# Altium PCB project_12.PcbDoc
Units mil, origin at the board's own origin, x right, y up, seen from the top; angles counter-clockwise.
Board outline 2965 x 1825 mil, 2 copper layers (Top Layer, Bottom Layer); 15 components, 43 nets, 104 pads, 4 vias.
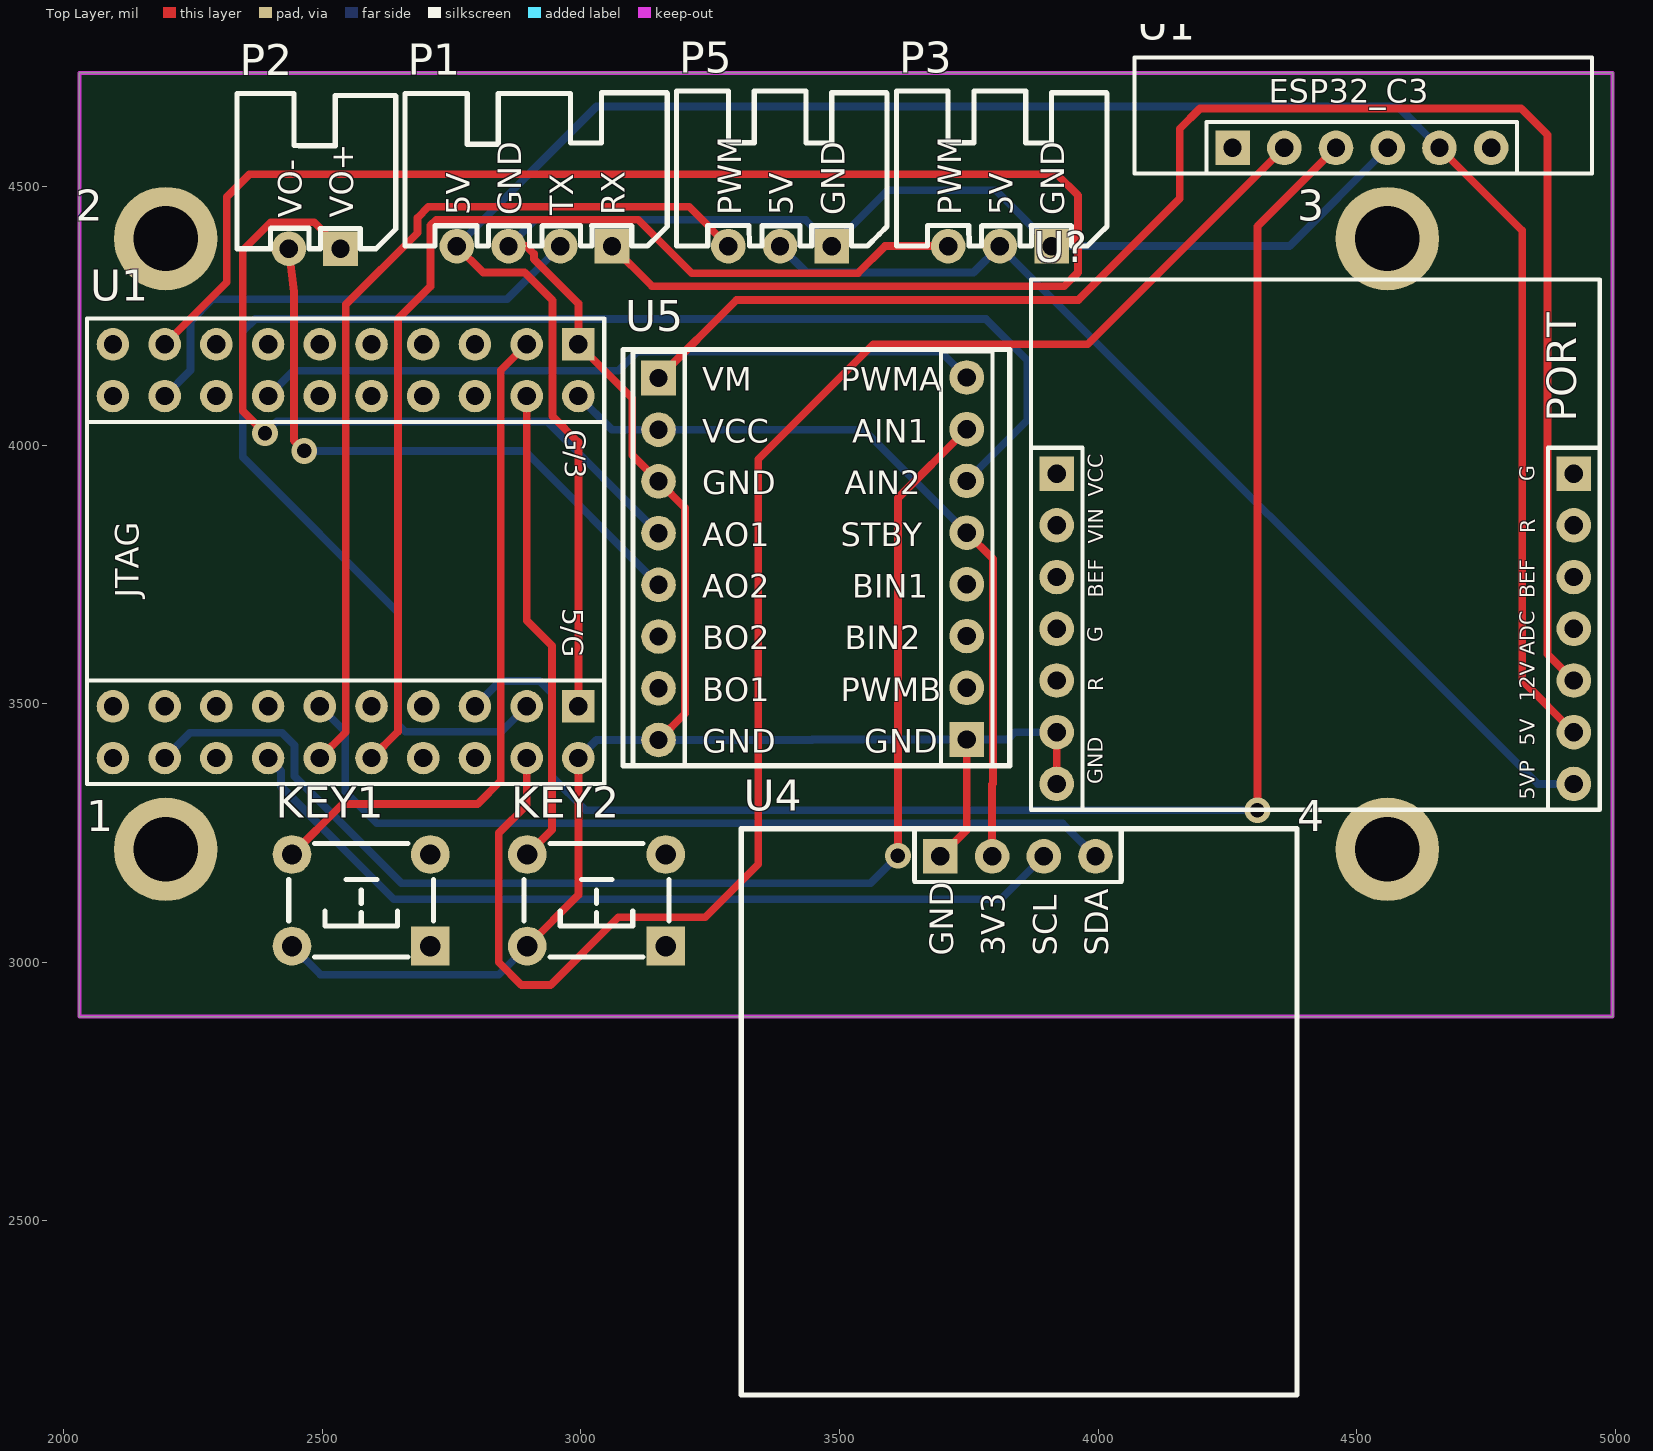
[diagram p0: Top Layer view]
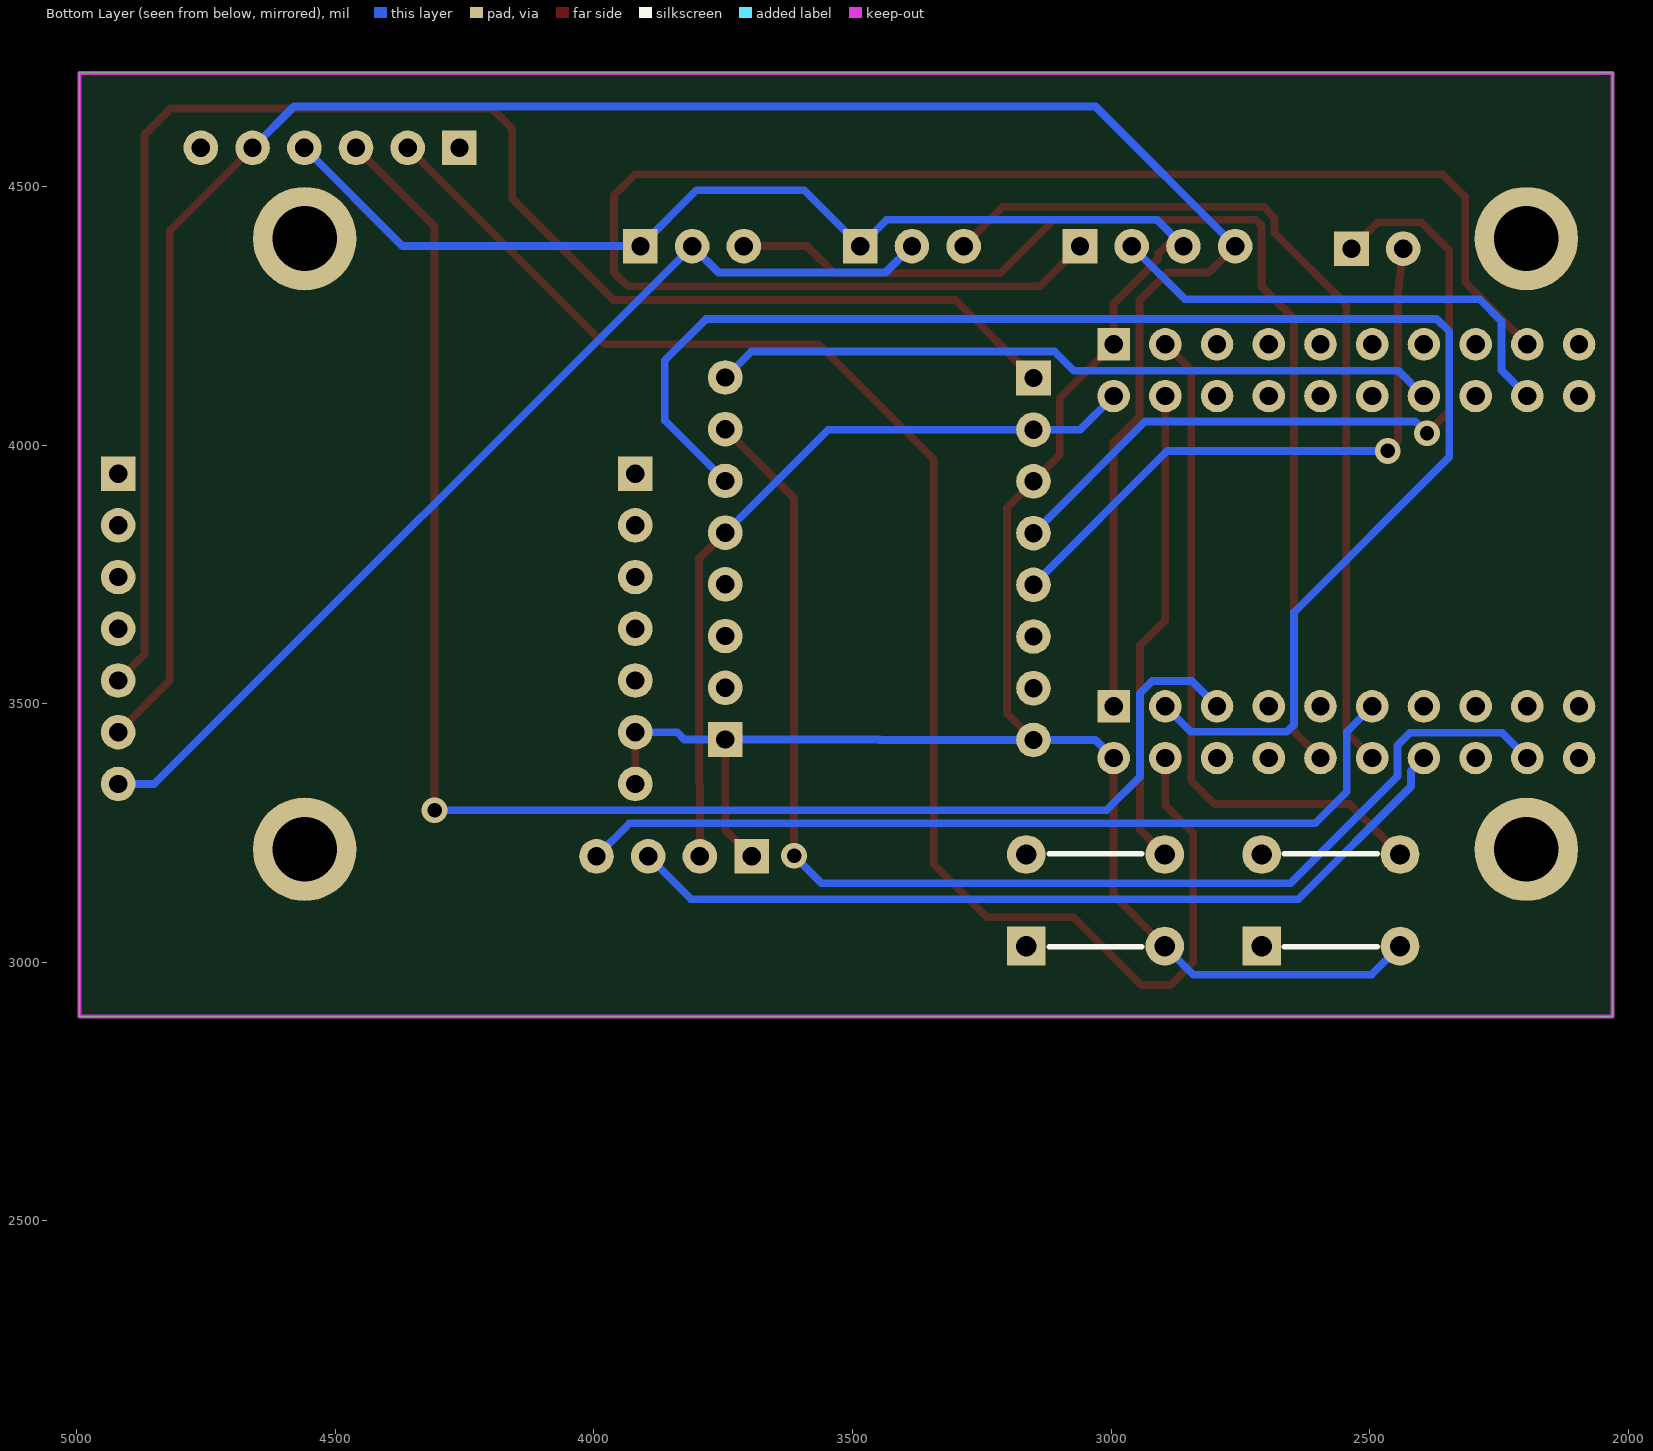
[diagram p1: Bottom Layer view, seen from below]

## Layer stack, top to bottom
Top Solder: solder mask 0.4, Solder Resist, Dk 3.5
Top Layer: signal copper 1.4
Dielectric 1: dielectric 12.6, FR-4, Dk 4.8
Bottom Layer: signal copper 1.4
Bottom Solder: solder mask 0.4, Solder Resist, Dk 3.5

## Board outline
2030,2895 4995,2895 4995,4720 2030,4720

## Design rules (kind name [scope] priority, off if disabled: settings)
Clearance [All] p1: gap=10 ignorepadtopadclearanceinfootprint=FALSE
PolygonConnect [All] p1: connectstyle=Relief reliefconductorwidth=10 reliefentries=4 polygonreliefangle="90 Angle" airgapwidth=10
RoutingVias [All] p1: holewidth=28 width=50 viastyle="Through Hole" minholewidth=28 minwidth=50 maxholewidth=28 maxwidth=50
SolderMaskExpansion [All] p1: expansion=4 istentingtop=FALSE
SupplyNets "Schematic Supply Nets_4" [InNet('5V_POW')] p1: voltage=0.000
SupplyNets "Schematic Supply Nets_3" [InNet('12V')] p2: voltage=0.000
SupplyNets "Schematic Supply Nets_2" [InNet('3V3')] p3: voltage=0.000
SupplyNets "Schematic Supply Nets_1" [InNet('5V')] p4: voltage=0.000
SupplyNets "Schematic Supply Nets" [InNet('GND')] p5: voltage=0.000
Width [All] p1: maxlimit=100 minlimit=10 preferedwidth=15 minimp=50.000000 maximp=50.000000 favimp=50.000000
30 further rules are at their usual default settings.

## Classes and differential pairs
component class project_12: 1 2 3 4 KEY1 KEY2 P1 P2 P3 P5 U1 U4 U5 U?

## Components (designator, comment, footprint, x,y, rotation, side; value= is the part's Value field where it differs from the comment)
1 "M3" "M3 125X200" 2197.01,3218.5 r90 top locked
2 "M3" "M3 125X200" 2197.01,4399.61 r90 top locked
3 "M3" "M3 125X200" 4559.21,4399.61 r90 top locked
4 "M3" "M3 125X200" 4559.21,3218.5 r90 top locked
KEY1 "mod_buttom" MOD_BUTTOM 2585,3120 r180 top
KEY2 "mod_buttom" MOD_BUTTOM 3040,3120 r180 top
P1 "port_uart_4p" XH2.54_4P 2915,4540 r0 top
P2 "port_mot_2p" XH2.54_2P 2480,4505 r0 top
P3 "port_pwm_3p" XH2.54_3P 3825,4520 r0 top
P5 "port_pwm_3p" XH2.54_3P 3400,4520 r0 top
U1 "f1_hw_1_gw" F1_HW_1_GW 2530,3805 r0 top
U1 "c3_hw_1" C3_HW_1 4510,4575 r0 top
U4 "mod_oled" mod_oled 3849.91,3203.15 r0 top
U5 "mod_tb6612" MOD_TB6612 3455,3780 r0 top
U? "pow_hw_3_V02.00" POW_HW_3_2 4385,3765 r90 top

## Footprints (in the part's own frame and the unit in brackets; to place one, negate y for a bottom-side part, rotate by r counter-clockwise, add the part's x,y. Pads: shape width x height; smd on the part's side, far side on the other; paste and mask are expansions set on the pad)
C3_HW_1 [mm]
  rect 1.7x1.7 hole 0.9: 1(-6.35,0)
  round 1.7 hole 0.9: 2(-3.81,0) 3(-1.27,0) 4(1.27,0) 5(3.81,0) 6(6.35,0)
  silkscreen extent -11.18,-1.27 11.3,4.44, body extent -11.18,-1.27 11.3,4.44, height 8.5
F1_HW_1_GW [mm]
  rect 1.6x1.6 hole 0.9: 1(11.811,9.906) 21(11.811,-7.874)
  round 1.6 hole 0.9: 2(11.811,7.366) 3(9.271,9.906) 4(9.271,7.366) 5(6.731,9.906) 6(6.731,7.366) 7(4.191,9.906) 8(4.191,7.366) 9(1.651,9.906) 10(1.651,7.366) 11(-0.889,9.906) 12(-0.889,7.366) 13(-3.429,9.906) 14(-3.429,7.366) 15(-5.969,9.906) 16(-5.969,7.366) 17(-8.509,9.906) 18(-8.509,7.366) 19(-11.049,9.906) 20(-11.049,7.366) 22(11.811,-10.414) 23(9.271,-7.874) 24(9.271,-10.414) 25(6.731,-7.874) 26(6.731,-10.414) 27(4.191,-7.874) 28(4.191,-10.414) 29(1.651,-7.874) 30(1.651,-10.414) 31(-0.889,-7.874) 32(-0.889,-10.414) 33(-3.429,-7.874) 34(-3.429,-10.414) 35(-5.969,-7.874) 36(-5.969,-10.414) 37(-8.509,-7.874) 38(-8.509,-10.414) 39(-11.049,-7.874) 40(-11.049,-10.414)
  silkscreen extent -12.32,-11.68 13.08,11.18, body extent -12.38,-11.68 13.08,11.18, height 8.5
"M3 125X200" [mil] "M3螺丝孔，孔125Mil，焊盘200Mil"
  round 200 hole 125: 1(0,0)
MOD_BUTTOM [mm]
  rect 1.9x1.9 hole 1: 1(-3.146,2.25)
  round 1.9 hole 1: 2(-3.146,-2.25) 3(3.654,-2.25) 4(3.654,2.25)
  silkscreen extent -3.3,-2.79 3.81,2.79, body extent -3.85,-3 4.36,3, height 4.25
mod_oled [mm] "外购屏幕模块接口"
  rect 1.7x1.7 hole 0.9: 1(-3.935,0.047)
  round 1.7 hole 0.9: 2(-1.395,0.047) 3(1.145,0.047) 4(3.685,0.047)
  silkscreen extent -13.72,-26.4 13.58,1.4, body extent -13.72,-26.42 13.59,1.4, height 8.5
MOD_TB6612 [mm]
  rect 1.7x1.7 hole 0.9: 1(-7.747,8.89) 16(7.391,-8.867)
  round 1.7 hole 0.9: 2(-7.747,6.35) 3(-7.747,3.81) 4(-7.747,1.27) 5(-7.747,-1.27) 6(-7.747,-3.81) 7(-7.747,-6.35) 8(-7.747,-8.89) 9(7.391,8.913) 10(7.391,6.373) 11(7.391,3.833) 12(7.391,1.293) 13(7.391,-1.247) 14(7.391,-3.787) 15(7.391,-6.327)
  silkscreen extent -9.5,-10.16 9.5,10.29, body extent -9.5,-10.16 9.5,10.29, height 8.5
POW_HW_3_2 [mm]
  rect 1.7x1.7 hole 0.9: 1(4.572,11.811) 7(4.572,-13.589)
  round 1.7 hole 0.9: 2(2.032,11.811) 3(-0.508,11.811) 4(-3.048,11.811) 5(-5.588,11.811) 6(-10.668,11.811) 6(-8.128,11.811) 8(2.032,-13.589) 9(-0.508,-13.589) 10(-3.048,-13.589) 11(-5.588,-13.589) 12(-8.128,-13.589) 13(-10.668,-13.589)
  silkscreen extent -11.94,-14.86 14.1,13.08, body extent -11.94,-14.86 14.1,13.08, height 8.5
XH2.54_2P [mm]
  rect 1.7x1.7 hole 0.9: 1(1.397,-3.175)
  round 1.7 hole 0.9: 2(-1.143,-3.175)
  silkscreen extent -3.68,-3.17 4.11,4.44, body extent -3.64,-3.52 3.9,4.17, height 5.73
XH2.54_3P [mm]
  rect 1.7x1.7 hole 0.9: 1(2.159,-3.429)
  round 1.7 hole 0.9: 2(-0.381,-3.429) 3(-2.921,-3.429)
  silkscreen extent -5.46,-3.43 4.88,4.19, body extent -5.42,-3.78 4.66,3.92, height 5.73
XH2.54_4P [mm]
  rect 1.7x1.7 hole 0.9: 1(3.683,-3.937)
  round 1.7 hole 0.9: 2(1.143,-3.937) 3(-1.397,-3.937) 4(-3.937,-3.937)
  silkscreen extent -6.48,-3.94 6.4,3.59, body extent -6.44,-4.29 6.18,3.41, height 5.73

## Part data
1 2 3 4: library part prot_m3, "m3铜柱孔", BOM名称=铜柱孔, 学习资源=www.ooocke.com, 版权归属=源创客
KEY1 KEY2: "6*6*4.3按键"
P1: "串口接口/SPP蓝牙模块 / XH2.54弯排针4p/4p排母"
P2: "开环直流电机接口 / XH2.54弯排针2p"
P3 P5: "舵机接口 / XH2.54弯排针3p"
U1: "ESP32C3蓝牙模块 / 6p排母"
U4: "外购屏幕模块"
U5: "TB6612模块 / 8p排母*2"
U?: "两路降压电源模块一路通用电源模块"

## Via types
v1: diameter 50, hole 28, Top Layer to Bottom Layer, 4 vias

## Nets (pads, with @x,y where several pads share a name; then routed paths per layer and width w, separated by ;. In a path a pad name is that pad's centre, name@x,y a point inside that pad or via, vN(x,y) a via of type N, cw(c..) or ccw(c..) an arc to the next point about the centre after c; other vN are vias at no path point)
3V3: U1.2@2995,4095 U4.2 U5.2 U5.12 | length 1508.2
  Top Layer w15: U5.12 3797,3779.89 3797,3346 3795,3344 U4.2
  Bottom Layer w15: U1.2@2995,4095 3060,4030 U5.2 3546.89,4030 U5.12
5V: P1.4 U1.5@4660,4575 U1.21 U?.12 | length 4316.9
  Top Layer w15: P1.4 2811,4334 2891,4334 2945,4280 2945,4056 2995,4006 U1.21 ; U1.5@4660,4575 4820,4415 4820,3545 U?.12
  Bottom Layer w15: P1.4 3030,4655 4580,4655 U1.5@4660,4575
5V_POW: P3.2 P5.2 U?.13 | length 2008
  Bottom Layer w15: P5.2 3436,4334 3759,4334 P3.2 4850,3345 U?.13
12V: U5.1 U?.11 | length 3111.1
  Top Layer w15: U5.1 3301,4281 3962,4281 4158,4477 4158,4612 4197,4651 4818,4651 4869,4600 4869,3596 U?.11
AO1: P2.1 U5.4 | length 1464.3
  Top Layer w15: v1(2389,4023) 2346,4066 2346,4377 2400,4431 2484,4431 P2.1
  Bottom Layer w15: v1(2389,4023) 2412.01,4046.01 2933.99,4046.01 U5.4
AO2: P2.2 U5.5 | length 1192.2
  Top Layer w15: P2.2 2445,4297 2445,4009 v1(2465,3989)
  Bottom Layer w15: v1(2465,3989) 2891,3989 U5.5
BOOT0: U1.35
GND: KEY1.4 KEY2.4 P1.3 P3.1 P5.1 U1.1@2995,4195 U1.4@4560,4575 U1.22 U4.1 U5.3 U5.8 U5.16 U?.6 | length 5245.9
  Top Layer w15: P1.3 2894.03,4385 2909.03,4370 2909.03,4360 2995,4274.03 2995,4195 3099,4091 3099,3981 U5.3 3201,3879 3201,3481 U5.8 ; KEY2.4 2995,3130.28 U1.22 ; U4.1 3745.98,3255.98 U5.16 ; U?.6@3920,3345 U?.6@3920,3445
  Bottom Layer w15: KEY1.4 2496.56,2976 2840.72,2976 KEY2.4 ; P1.3 2911,4436 3434,4436 P5.1 3593,4493 3802,4493 P3.1 4370,4385 U1.4@4560,4575 ; U1.22 3030,3430 U5.8 3447,3430 3447.91,3430.91 U5.16 3825,3430.91 3839.09,3445 U?.6@3920,3445
NRST: U1.12
PA0: U1.20
PA1: U1.19
PA2: P1.2 U1.18 | length 940.8
  Bottom Layer w15: U1.18 2245,4145 2245,4240 2287,4282 2857,4282 P1.2
PA3: P1.1 U1.17 | length 3109
  Top Layer w15: U1.17 2315,4315 2315,4480 2359,4524 3920,4524 3961,4483 3961,4334 3934.5,4307.5 3137.5,4307.5 P1.1
PA4: U1.16
PA5: U1.15
PA6: U1.14 U5.9 | length 1407.4
  Bottom Layer w15: U1.14 2444,4144 3072,4144 3109,4181 3695.89,4181 U5.9
PA7: U1.13
PA8: U1.23 U5.11 | length 3001
  Bottom Layer w15: U1.23 2846,3446 2660,3446 2646,3460 2646,3677.19 2346,3977.19 2346,4220 2370,4244 3783,4244 3863,4164 3863,4047.92 U5.11
PA9: U1.2@4360,4575 U1.24 | length 3083.9
  Top Layer w15: U1.24 2895,3304 2841,3250 2841,3000 2885,2956 2941,2956 3072,3087 3240,3087 3343,3190 3343,3973 3565,4195 3980,4195 U1.2@4360,4575
PA10: U1.3@4460,4575 U1.25 | length 3075.1
  Top Layer w15: v1(4308,3294.03) 4308,4423 U1.3@4460,4575
  Bottom Layer w15: U1.25 2844,3544 2920,3544 2944,3520 2944,3359 3008.97,3294.03 v1(4308,3294.03)
PA11: U1.26
PA12: U1.27
PA13: U1.28
PA14: U1.29
PA15: P3.3 U1.30 | length 2147.3
  Top Layer w15: U1.30 2646,3446 2646,4244 2709.03,4307.03 2709.03,4425 2720,4435.97 3111,4435.97 3214.47,4332.5 3535.5,4332.5 3588,4385 P3.3
PB0: U1.11
PB1: U1.9
PB2: U1.10
PB3: P5.3 U1.32 | length 1764.4
  Top Layer w15: U1.32 2545,3445 2545,4272 2684.03,4411.03 2684.03,4440 2705,4460.97 3209.03,4460.97 P5.3
PB4: U1.31 U4.4 | length 1688.1
  Bottom Layer w15: U1.31 2544,3446 2544,3330 2604.97,3269.03 3930.97,3269.03 U4.4
PB5: U1.34 U4.3 | length 1665
  Bottom Layer w15: U1.34 2420.04,3369.96 2420.04,3340 2638.04,3122 3812,3122 U4.3
PB6: U1.33
PB7: U1.36
PB8: U1.38 U5.10 | length 2495.9
  Top Layer w15: v1(3613,3206) 3613,3897.92 U5.10
  Bottom Layer w15: U1.38 2244,3444 2422,3444 2446,3420 2446,3360 2653,3153 3560,3153 v1(3613,3206)
PB9: U1.37
PB10: U1.7
PB11: U1.8
PB12: U1.5@2795,4195
PB13: U1.6@2795,4095
PB14: KEY1.3 U1.3@2895,4195 | length 1327.6
  Top Layer w15: KEY1.3 2538.56,3306 2800,3306 2845,3351 2845,4145 U1.3@2895,4195
PB15: KEY2.3 U1.4@2895,4095 | length 926.5
  Top Layer w15: U1.4@2895,4095 2895,3661 2944,3612 2944,3256.44 KEY2.3
PC13: U1.39
VBAT: U1.40
pads on no net: 1.1 2.1 3.1 4.1 KEY1.1 KEY1.2 KEY2.1 KEY2.2 U1.1@4260,4575 U1.6@4760,4575 U5.6 U5.7 U5.13 U5.14 U5.15 U?.1 U?.2 U?.3 U?.4 U?.5 U?.7 U?.8 U?.9 U?.10

## Keep-outs
Keep-Out Layer:
  lines w7.87: 2030,2895 4995,2895 4995,4720 2030,4720 2030,2940 2030,2895

## Text inside footprints (layer, text, board x,y; h text height)
P1: Top Overlay "5V" at 2785,4445 h45 r90; Top Overlay "GND" at 2885,4445 h45 r90; Top Overlay "TX" at 2985,4445 h45 r90; Top Overlay "RX" at 3085,4445 h45 r90
P2: Top Overlay "VO-" at 2460,4440 h45 r90; Top Overlay "VO+" at 2560,4440 h45 r90
P3: Top Overlay "GND" at 3935,4445 h45 r90; Top Overlay "5V" at 3835,4445 h45 r90; Top Overlay "PWM" at 3735,4445 h45 r90
P5: Top Overlay "GND" at 3510,4445 h45 r90; Top Overlay "5V" at 3410,4445 h45 r90; Top Overlay "PWM" at 3310,4445 h45 r90
U1: Top Overlay "ESP32_C3" at 4330,4662.5 h45
U1: Top Overlay "5/G" at 2965,3685 h39.37 r270; Top Overlay "G/3" at 2970,4030 h39.37 r270; Top Overlay "JTAG" at 2145,3705 h45 r90
U4: Top Overlay "GND" at 3719.91,3013.15 h45 r90; Top Overlay "SDA" at 4019.91,3013.15 h45 r90; Top Overlay "SCL" at 3919.91,3013.15 h45 r90; Top Overlay "3V3" at 3819.91,3013.15 h45 r90
U5: Top Overlay "GND" at 3547.49,3405 h45; Top Overlay "PWMB" at 3502.5,3505 h45; Top Overlay "BIN2" at 3510,3605 h45; Top Overlay "BIN1" at 3525,3705 h45; Top Overlay "STBY" at 3502.5,3805 h45; Top Overlay "AIN2" at 3510,3905 h45; Top Overlay "AIN1" at 3525,4005 h45; Top Overlay "PWMA" at 3502.5,4105 h45; Top Overlay "GND" at 3235,3905 h45; Top Overlay "GND" at 3235,3405 h45; Top Overlay "BO2" at 3235,3605 h45; Top Overlay "BO1" at 3235,3505 h45; Top Overlay "AO2" at 3235,3705 h45; Top Overlay "AO1" at 3235,3805 h45; Top Overlay "VCC" at 3235,4005 h45; Top Overlay "VM" at 3235,4105 h45
U?: Top Overlay "GND" at 4018.81,3344.04 h50 r90; Top Overlay "G" at 4018.81,3619.04 h50 r90; Top Overlay "R" at 4019.34,3524.04 h50 r90; Top Overlay "BEF" at 4020,3705 h50 r90; Top Overlay "VIN" at 4019.33,3809.07 h50 r90; Top Overlay "VCC" at 4019.48,3900.03 h50 r90; Top Overlay "12V" at 4854.34,3504.04 h50 r90; Top Overlay "5VP" at 4853.81,3314.04 h50 r90; Top Overlay "5V" at 4853.81,3419.04 h50 r90; Top Overlay "G" at 4854.48,3930 h50 r90; Top Overlay "ADC" at 4853.81,3594.04 h50 r90; Top Overlay "R" at 4855,3830 h50 r90; Top Overlay "BEF" at 4854.34,3704.04 h50 r90; Top Overlay "PORT" at 4943.98,4045 h98.43 r90